# Altium PCB PCB1.PcbDoc
Units mm, origin at the board's own origin, x right, y up, seen from the top; angles counter-clockwise.
Board outline 200 x 100 mm, 2 copper layers (Top Layer, Bottom Layer); 140 components, 98 nets, 280 pads, 2 vias.
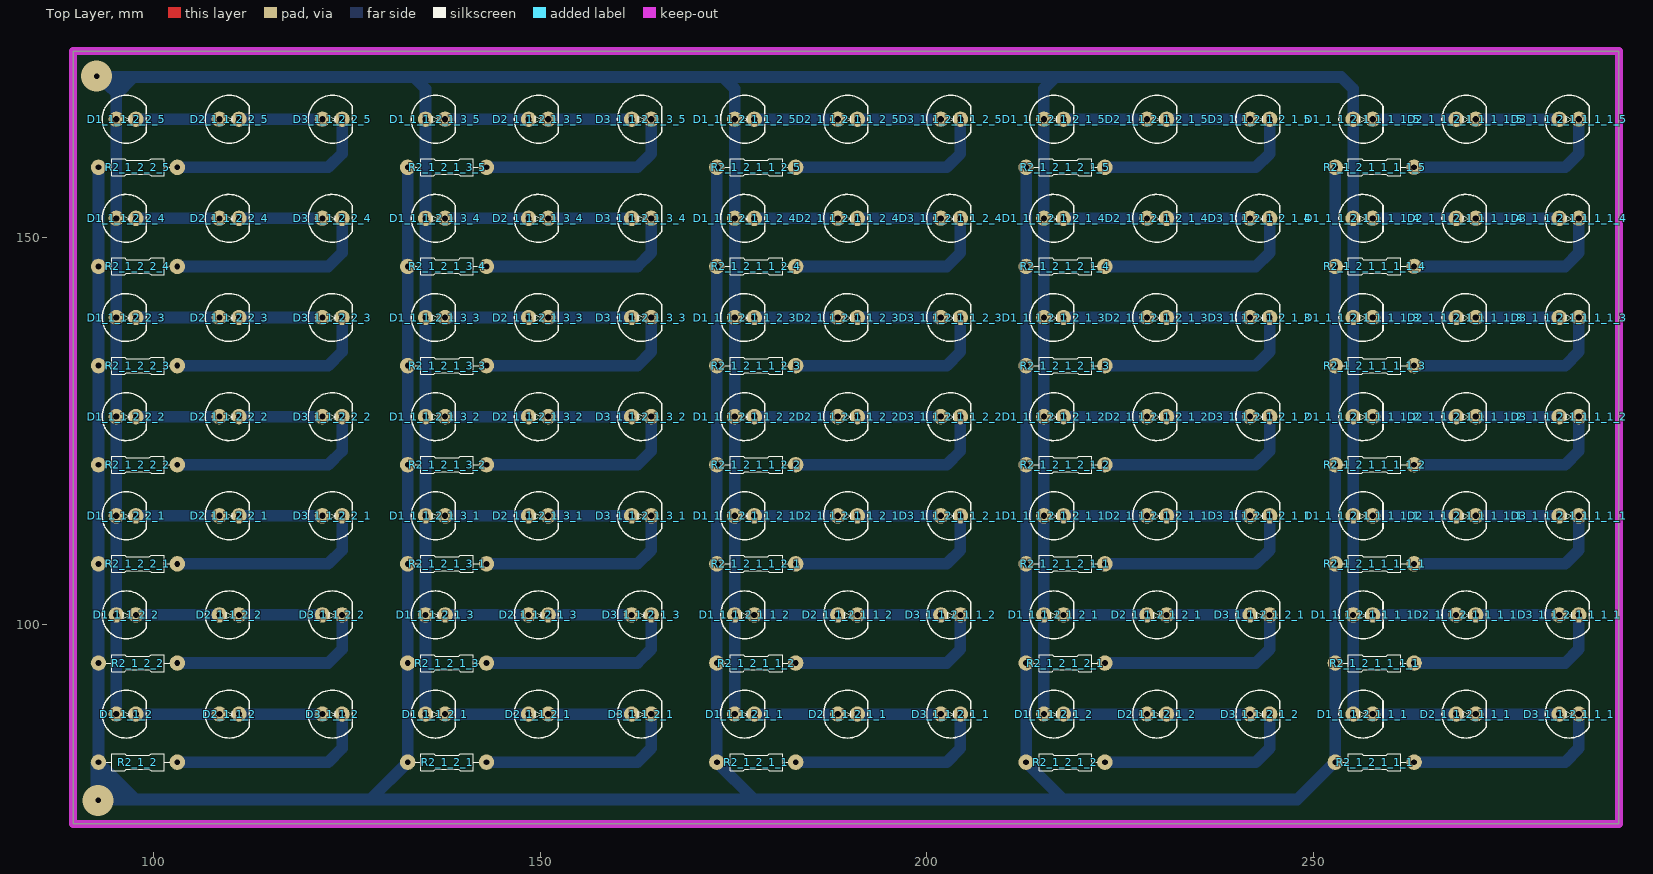
[diagram p0: Top Layer view]
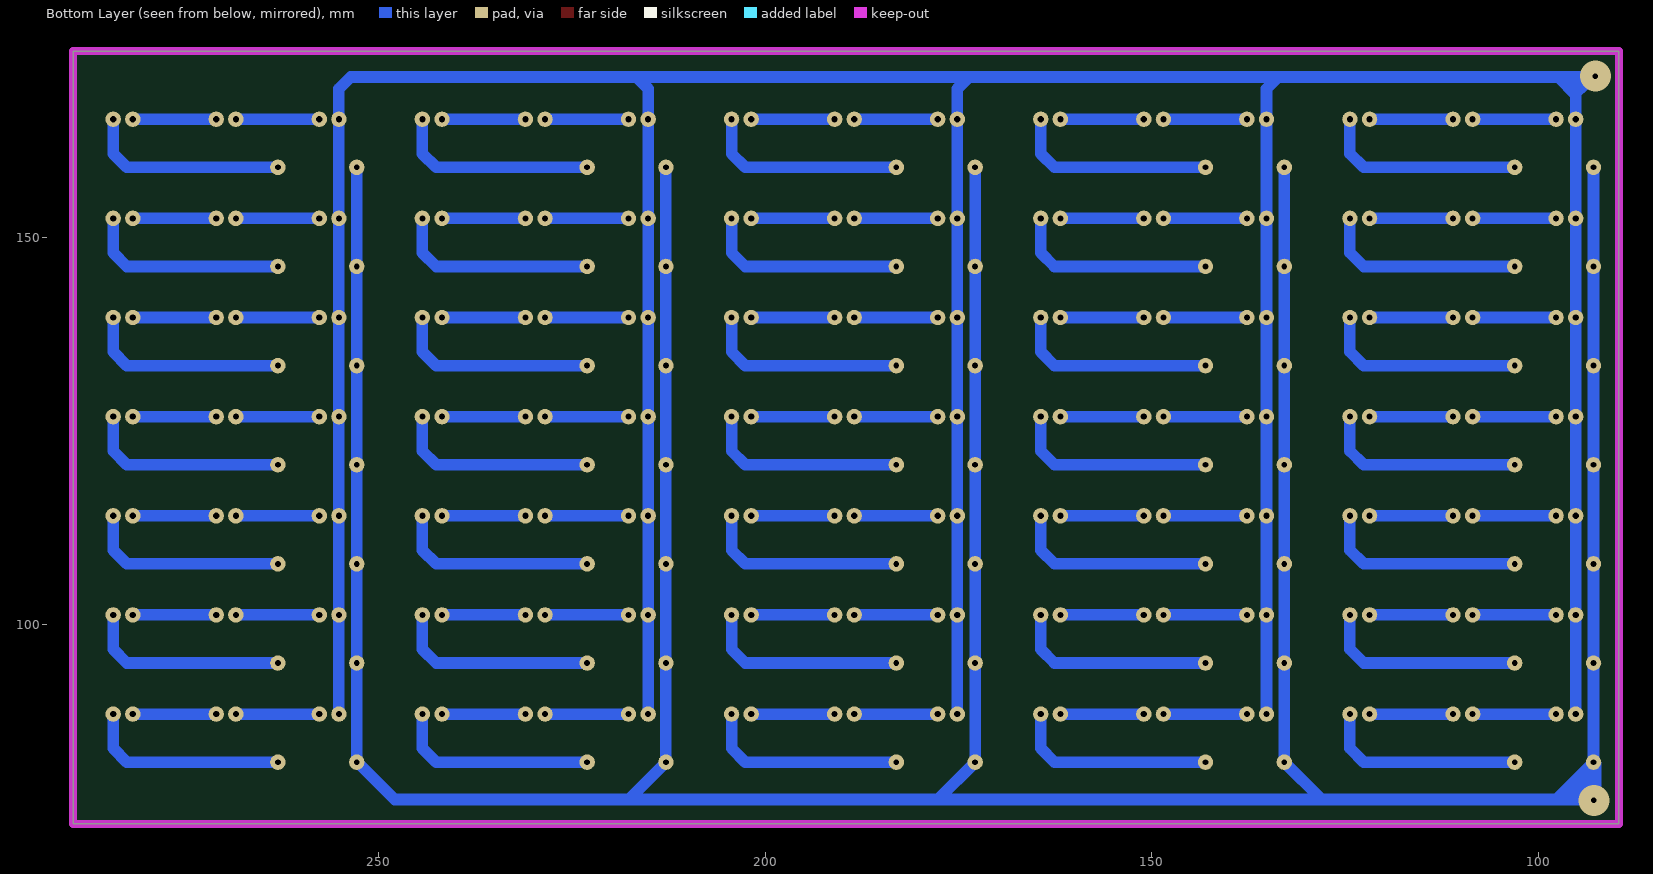
[diagram p1: Bottom Layer view, seen from below]

## Layer stack, top to bottom
Top Solder: solder mask 0.0102, Solder Resist, Dk 3.5
Top Layer: signal copper 0.0356
Dielectric 1: dielectric 0.32, FR-4, Dk 4.8
Bottom Layer: signal copper 0.0356
Bottom Solder: solder mask 0.0102, Solder Resist, Dk 3.5

## Board outline
89.535,74.168 289.535,74.168 289.535,174.168 89.535,174.168

## Design rules (kind name [scope] priority, off if disabled: settings)
Clearance [All] p1: gap=0.254 ignorepadtopadclearanceinfootprint=FALSE except(0: Arc-Hole Track-Hole SMDPad-Hole THPad-Hole Via-Hole Fill-Hole Poly-Hole Region-Hole Text-Hole)
PolygonConnect [All] p1: connectstyle=Relief reliefconductorwidth=0.254 reliefentries=4 polygonreliefangle="90 Angle" airgapwidth=0.254
RoutingVias [All] p1: holewidth=0.711 width=1.27 viastyle="Through Hole" minholewidth=0.711 minwidth=1.27 maxholewidth=0.711 maxwidth=1.27
SolderMaskExpansion [All] p1: expansion=0.102 istentingtop=FALSE
Width [All] p1: maxlimit=2 minlimit=0.5 preferedwidth=1
30 further rules are at their usual default settings.

## Components (designator, comment, footprint, x,y, rotation, side; value= is the part's Value field where it differs from the comment)
D1_1_1_2 "LED 5MM" LED5MM_BLUE 96.393,88.392 r0 top (schematic designator D1)
D1_1_1_2_1 "LED 5MM" LED5MM_BLUE 136.398,88.392 r0 top (schematic designator D1)
D1_1_1_2_1_1 "LED 5MM" LED5MM_BLUE 176.403,88.392 r0 top (schematic designator D1)
D1_1_1_2_1_1_1 "LED 5MM" LED5MM_BLUE 256.413,88.392 r0 top (schematic designator D1)
D1_1_1_2_1_1_1_1 "LED 5MM" LED5MM_BLUE 256.413,101.219 r0 top (schematic designator D1)
D1_1_1_2_1_1_1_1_1 "LED 5MM" LED5MM_BLUE 256.413,114.046 r0 top (schematic designator D1)
D1_1_1_2_1_1_1_1_2 "LED 5MM" LED5MM_BLUE 256.413,126.873 r0 top (schematic designator D1)
D1_1_1_2_1_1_1_1_3 "LED 5MM" LED5MM_BLUE 256.413,139.7 r0 top (schematic designator D1)
D1_1_1_2_1_1_1_1_4 "LED 5MM" LED5MM_BLUE 256.413,152.527 r0 top (schematic designator D1)
D1_1_1_2_1_1_1_1_5 "LED 5MM" LED5MM_BLUE 256.413,165.354 r0 top (schematic designator D1)
D1_1_1_2_1_1_2 "LED 5MM" LED5MM_BLUE 176.403,101.219 r0 top (schematic designator D1)
D1_1_1_2_1_1_2_1 "LED 5MM" LED5MM_BLUE 176.403,114.046 r0 top (schematic designator D1)
D1_1_1_2_1_1_2_2 "LED 5MM" LED5MM_BLUE 176.403,126.873 r0 top (schematic designator D1)
D1_1_1_2_1_1_2_3 "LED 5MM" LED5MM_BLUE 176.403,139.7 r0 top (schematic designator D1)
D1_1_1_2_1_1_2_4 "LED 5MM" LED5MM_BLUE 176.403,152.527 r0 top (schematic designator D1)
D1_1_1_2_1_1_2_5 "LED 5MM" LED5MM_BLUE 176.403,165.354 r0 top (schematic designator D1)
D1_1_1_2_1_2 "LED 5MM" LED5MM_BLUE 216.408,88.392 r0 top (schematic designator D1)
D1_1_1_2_1_2_1 "LED 5MM" LED5MM_BLUE 216.408,101.219 r0 top (schematic designator D1)
D1_1_1_2_1_2_1_1 "LED 5MM" LED5MM_BLUE 216.408,114.046 r0 top (schematic designator D1)
D1_1_1_2_1_2_1_2 "LED 5MM" LED5MM_BLUE 216.408,126.873 r0 top (schematic designator D1)
D1_1_1_2_1_2_1_3 "LED 5MM" LED5MM_BLUE 216.408,139.7 r0 top (schematic designator D1)
D1_1_1_2_1_2_1_4 "LED 5MM" LED5MM_BLUE 216.408,152.527 r0 top (schematic designator D1)
D1_1_1_2_1_2_1_5 "LED 5MM" LED5MM_BLUE 216.408,165.354 r0 top (schematic designator D1)
D1_1_1_2_1_3 "LED 5MM" LED5MM_BLUE 136.398,101.219 r0 top (schematic designator D1)
D1_1_1_2_1_3_1 "LED 5MM" LED5MM_BLUE 136.398,114.046 r0 top (schematic designator D1)
D1_1_1_2_1_3_2 "LED 5MM" LED5MM_BLUE 136.398,126.873 r0 top (schematic designator D1)
D1_1_1_2_1_3_3 "LED 5MM" LED5MM_BLUE 136.398,139.7 r0 top (schematic designator D1)
D1_1_1_2_1_3_4 "LED 5MM" LED5MM_BLUE 136.398,152.527 r0 top (schematic designator D1)
D1_1_1_2_1_3_5 "LED 5MM" LED5MM_BLUE 136.398,165.354 r0 top (schematic designator D1)
D1_1_1_2_2 "LED 5MM" LED5MM_BLUE 96.393,101.219 r0 top (schematic designator D1)
D1_1_1_2_2_1 "LED 5MM" LED5MM_BLUE 96.393,114.046 r0 top (schematic designator D1)
D1_1_1_2_2_2 "LED 5MM" LED5MM_BLUE 96.393,126.873 r0 top (schematic designator D1)
D1_1_1_2_2_3 "LED 5MM" LED5MM_BLUE 96.393,139.7 r0 top (schematic designator D1)
D1_1_1_2_2_4 "LED 5MM" LED5MM_BLUE 96.393,152.527 r0 top (schematic designator D1)
D1_1_1_2_2_5 "LED 5MM" LED5MM_BLUE 96.393,165.354 r0 top (schematic designator D1)
D2_1_1_2 "LED 5MM" LED5MM_BLUE 109.728,88.392 r0 top (schematic designator D2)
D2_1_1_2_1 "LED 5MM" LED5MM_BLUE 149.733,88.392 r0 top (schematic designator D2)
D2_1_1_2_1_1 "LED 5MM" LED5MM_BLUE 189.738,88.392 r0 top (schematic designator D2)
D2_1_1_2_1_1_1 "LED 5MM" LED5MM_BLUE 269.748,88.392 r0 top (schematic designator D2)
D2_1_1_2_1_1_1_1 "LED 5MM" LED5MM_BLUE 269.748,101.219 r0 top (schematic designator D2)
D2_1_1_2_1_1_1_1_1 "LED 5MM" LED5MM_BLUE 269.748,114.046 r0 top (schematic designator D2)
D2_1_1_2_1_1_1_1_2 "LED 5MM" LED5MM_BLUE 269.748,126.873 r0 top (schematic designator D2)
D2_1_1_2_1_1_1_1_3 "LED 5MM" LED5MM_BLUE 269.748,139.7 r0 top (schematic designator D2)
D2_1_1_2_1_1_1_1_4 "LED 5MM" LED5MM_BLUE 269.748,152.527 r0 top (schematic designator D2)
D2_1_1_2_1_1_1_1_5 "LED 5MM" LED5MM_BLUE 269.748,165.354 r0 top (schematic designator D2)
D2_1_1_2_1_1_2 "LED 5MM" LED5MM_BLUE 189.738,101.219 r0 top (schematic designator D2)
D2_1_1_2_1_1_2_1 "LED 5MM" LED5MM_BLUE 189.738,114.046 r0 top (schematic designator D2)
D2_1_1_2_1_1_2_2 "LED 5MM" LED5MM_BLUE 189.738,126.873 r0 top (schematic designator D2)
D2_1_1_2_1_1_2_3 "LED 5MM" LED5MM_BLUE 189.738,139.7 r0 top (schematic designator D2)
D2_1_1_2_1_1_2_4 "LED 5MM" LED5MM_BLUE 189.738,152.527 r0 top (schematic designator D2)
D2_1_1_2_1_1_2_5 "LED 5MM" LED5MM_BLUE 189.738,165.354 r0 top (schematic designator D2)
D2_1_1_2_1_2 "LED 5MM" LED5MM_BLUE 229.743,88.392 r0 top (schematic designator D2)
D2_1_1_2_1_2_1 "LED 5MM" LED5MM_BLUE 229.743,101.219 r0 top (schematic designator D2)
D2_1_1_2_1_2_1_1 "LED 5MM" LED5MM_BLUE 229.743,114.046 r0 top (schematic designator D2)
D2_1_1_2_1_2_1_2 "LED 5MM" LED5MM_BLUE 229.743,126.873 r0 top (schematic designator D2)
D2_1_1_2_1_2_1_3 "LED 5MM" LED5MM_BLUE 229.743,139.7 r0 top (schematic designator D2)
D2_1_1_2_1_2_1_4 "LED 5MM" LED5MM_BLUE 229.743,152.527 r0 top (schematic designator D2)
D2_1_1_2_1_2_1_5 "LED 5MM" LED5MM_BLUE 229.743,165.354 r0 top (schematic designator D2)
D2_1_1_2_1_3 "LED 5MM" LED5MM_BLUE 149.733,101.219 r0 top (schematic designator D2)
D2_1_1_2_1_3_1 "LED 5MM" LED5MM_BLUE 149.733,114.046 r0 top (schematic designator D2)
D2_1_1_2_1_3_2 "LED 5MM" LED5MM_BLUE 149.733,126.873 r0 top (schematic designator D2)
D2_1_1_2_1_3_3 "LED 5MM" LED5MM_BLUE 149.733,139.7 r0 top (schematic designator D2)
D2_1_1_2_1_3_4 "LED 5MM" LED5MM_BLUE 149.733,152.527 r0 top (schematic designator D2)
D2_1_1_2_1_3_5 "LED 5MM" LED5MM_BLUE 149.733,165.354 r0 top (schematic designator D2)
D2_1_1_2_2 "LED 5MM" LED5MM_BLUE 109.728,101.219 r0 top (schematic designator D2)
D2_1_1_2_2_1 "LED 5MM" LED5MM_BLUE 109.728,114.046 r0 top (schematic designator D2)
D2_1_1_2_2_2 "LED 5MM" LED5MM_BLUE 109.728,126.873 r0 top (schematic designator D2)
D2_1_1_2_2_3 "LED 5MM" LED5MM_BLUE 109.728,139.7 r0 top (schematic designator D2)
D2_1_1_2_2_4 "LED 5MM" LED5MM_BLUE 109.728,152.527 r0 top (schematic designator D2)
D2_1_1_2_2_5 "LED 5MM" LED5MM_BLUE 109.728,165.354 r0 top (schematic designator D2)
D3_1_1_2 "LED 5MM" LED5MM_BLUE 123.063,88.392 r0 top (schematic designator D2)
D3_1_1_2_1 "LED 5MM" LED5MM_BLUE 163.068,88.392 r0 top (schematic designator D2)
D3_1_1_2_1_1 "LED 5MM" LED5MM_BLUE 203.073,88.392 r0 top (schematic designator D2)
D3_1_1_2_1_1_1 "LED 5MM" LED5MM_BLUE 283.083,88.392 r0 top (schematic designator D2)
D3_1_1_2_1_1_1_1 "LED 5MM" LED5MM_BLUE 283.083,101.219 r0 top (schematic designator D2)
D3_1_1_2_1_1_1_1_1 "LED 5MM" LED5MM_BLUE 283.083,114.046 r0 top (schematic designator D2)
D3_1_1_2_1_1_1_1_2 "LED 5MM" LED5MM_BLUE 283.083,126.873 r0 top (schematic designator D2)
D3_1_1_2_1_1_1_1_3 "LED 5MM" LED5MM_BLUE 283.083,139.7 r0 top (schematic designator D2)
D3_1_1_2_1_1_1_1_4 "LED 5MM" LED5MM_BLUE 283.083,152.527 r0 top (schematic designator D2)
D3_1_1_2_1_1_1_1_5 "LED 5MM" LED5MM_BLUE 283.083,165.354 r0 top (schematic designator D2)
D3_1_1_2_1_1_2 "LED 5MM" LED5MM_BLUE 203.073,101.219 r0 top (schematic designator D2)
D3_1_1_2_1_1_2_1 "LED 5MM" LED5MM_BLUE 203.073,114.046 r0 top (schematic designator D2)
D3_1_1_2_1_1_2_2 "LED 5MM" LED5MM_BLUE 203.073,126.873 r0 top (schematic designator D2)
D3_1_1_2_1_1_2_3 "LED 5MM" LED5MM_BLUE 203.073,139.7 r0 top (schematic designator D2)
D3_1_1_2_1_1_2_4 "LED 5MM" LED5MM_BLUE 203.073,152.527 r0 top (schematic designator D2)
D3_1_1_2_1_1_2_5 "LED 5MM" LED5MM_BLUE 203.073,165.354 r0 top (schematic designator D2)
D3_1_1_2_1_2 "LED 5MM" LED5MM_BLUE 243.078,88.392 r0 top (schematic designator D2)
D3_1_1_2_1_2_1 "LED 5MM" LED5MM_BLUE 243.078,101.219 r0 top (schematic designator D2)
D3_1_1_2_1_2_1_1 "LED 5MM" LED5MM_BLUE 243.078,114.046 r0 top (schematic designator D2)
D3_1_1_2_1_2_1_2 "LED 5MM" LED5MM_BLUE 243.078,126.873 r0 top (schematic designator D2)
D3_1_1_2_1_2_1_3 "LED 5MM" LED5MM_BLUE 243.078,139.7 r0 top (schematic designator D2)
D3_1_1_2_1_2_1_4 "LED 5MM" LED5MM_BLUE 243.078,152.527 r0 top (schematic designator D2)
D3_1_1_2_1_2_1_5 "LED 5MM" LED5MM_BLUE 243.078,165.354 r0 top (schematic designator D2)
D3_1_1_2_1_3 "LED 5MM" LED5MM_BLUE 163.068,101.219 r0 top (schematic designator D2)
D3_1_1_2_1_3_1 "LED 5MM" LED5MM_BLUE 163.068,114.046 r0 top (schematic designator D2)
D3_1_1_2_1_3_2 "LED 5MM" LED5MM_BLUE 163.068,126.873 r0 top (schematic designator D2)
D3_1_1_2_1_3_3 "LED 5MM" LED5MM_BLUE 163.068,139.7 r0 top (schematic designator D2)
D3_1_1_2_1_3_4 "LED 5MM" LED5MM_BLUE 163.068,152.527 r0 top (schematic designator D2)
D3_1_1_2_1_3_5 "LED 5MM" LED5MM_BLUE 163.068,165.354 r0 top (schematic designator D2)
D3_1_1_2_2 "LED 5MM" LED5MM_BLUE 123.063,101.219 r0 top (schematic designator D2)
D3_1_1_2_2_1 "LED 5MM" LED5MM_BLUE 123.063,114.046 r0 top (schematic designator D2)
D3_1_1_2_2_2 "LED 5MM" LED5MM_BLUE 123.063,126.873 r0 top (schematic designator D2)
D3_1_1_2_2_3 "LED 5MM" LED5MM_BLUE 123.063,139.7 r0 top (schematic designator D2)
D3_1_1_2_2_4 "LED 5MM" LED5MM_BLUE 123.063,152.527 r0 top (schematic designator D2)
D3_1_1_2_2_5 "LED 5MM" LED5MM_BLUE 123.063,165.354 r0 top (schematic designator D2)
R2_1_2 "1K" "Axial 0_25 W, 0_4 IN LEAD PITCH" 97.917,82.169 r180 top (schematic designator R1)
R2_1_2_1 "1K" "Axial 0_25 W, 0_4 IN LEAD PITCH" 137.922,82.169 r180 top (schematic designator R1)
R2_1_2_1_1 "1K" "Axial 0_25 W, 0_4 IN LEAD PITCH" 177.927,82.169 r180 top (schematic designator R1)
R2_1_2_1_1_1 "1K" "Axial 0_25 W, 0_4 IN LEAD PITCH" 257.937,82.169 r180 top (schematic designator R1)
R2_1_2_1_1_1_1 "1K" "Axial 0_25 W, 0_4 IN LEAD PITCH" 257.937,94.996 r180 top (schematic designator R1)
R2_1_2_1_1_1_1_1 "1K" "Axial 0_25 W, 0_4 IN LEAD PITCH" 257.937,107.823 r180 top (schematic designator R1)
R2_1_2_1_1_1_1_2 "1K" "Axial 0_25 W, 0_4 IN LEAD PITCH" 257.937,120.65 r180 top (schematic designator R1)
R2_1_2_1_1_1_1_3 "1K" "Axial 0_25 W, 0_4 IN LEAD PITCH" 257.937,133.477 r180 top (schematic designator R1)
R2_1_2_1_1_1_1_4 "1K" "Axial 0_25 W, 0_4 IN LEAD PITCH" 257.937,146.304 r180 top (schematic designator R1)
R2_1_2_1_1_1_1_5 "1K" "Axial 0_25 W, 0_4 IN LEAD PITCH" 257.937,159.131 r180 top (schematic designator R1)
R2_1_2_1_1_2 "1K" "Axial 0_25 W, 0_4 IN LEAD PITCH" 177.927,94.996 r180 top (schematic designator R1)
R2_1_2_1_1_2_1 "1K" "Axial 0_25 W, 0_4 IN LEAD PITCH" 177.927,107.823 r180 top (schematic designator R1)
R2_1_2_1_1_2_2 "1K" "Axial 0_25 W, 0_4 IN LEAD PITCH" 177.927,120.65 r180 top (schematic designator R1)
R2_1_2_1_1_2_3 "1K" "Axial 0_25 W, 0_4 IN LEAD PITCH" 177.927,133.477 r180 top (schematic designator R1)
R2_1_2_1_1_2_4 "1K" "Axial 0_25 W, 0_4 IN LEAD PITCH" 177.927,146.304 r180 top (schematic designator R1)
R2_1_2_1_1_2_5 "1K" "Axial 0_25 W, 0_4 IN LEAD PITCH" 177.927,159.131 r180 top (schematic designator R1)
R2_1_2_1_2 "1K" "Axial 0_25 W, 0_4 IN LEAD PITCH" 217.932,82.169 r180 top (schematic designator R1)
R2_1_2_1_2_1 "1K" "Axial 0_25 W, 0_4 IN LEAD PITCH" 217.932,94.996 r180 top (schematic designator R1)
R2_1_2_1_2_1_1 "1K" "Axial 0_25 W, 0_4 IN LEAD PITCH" 217.932,107.823 r180 top (schematic designator R1)
R2_1_2_1_2_1_2 "1K" "Axial 0_25 W, 0_4 IN LEAD PITCH" 217.932,120.65 r180 top (schematic designator R1)
R2_1_2_1_2_1_3 "1K" "Axial 0_25 W, 0_4 IN LEAD PITCH" 217.932,133.477 r180 top (schematic designator R1)
R2_1_2_1_2_1_4 "1K" "Axial 0_25 W, 0_4 IN LEAD PITCH" 217.932,146.304 r180 top (schematic designator R1)
R2_1_2_1_2_1_5 "1K" "Axial 0_25 W, 0_4 IN LEAD PITCH" 217.932,159.131 r180 top (schematic designator R1)
R2_1_2_1_3 "1K" "Axial 0_25 W, 0_4 IN LEAD PITCH" 137.922,94.996 r180 top (schematic designator R1)
R2_1_2_1_3_1 "1K" "Axial 0_25 W, 0_4 IN LEAD PITCH" 137.922,107.823 r180 top (schematic designator R1)
R2_1_2_1_3_2 "1K" "Axial 0_25 W, 0_4 IN LEAD PITCH" 137.922,120.65 r180 top (schematic designator R1)
R2_1_2_1_3_3 "1K" "Axial 0_25 W, 0_4 IN LEAD PITCH" 137.922,133.477 r180 top (schematic designator R1)
R2_1_2_1_3_4 "1K" "Axial 0_25 W, 0_4 IN LEAD PITCH" 137.922,146.304 r180 top (schematic designator R1)
R2_1_2_1_3_5 "1K" "Axial 0_25 W, 0_4 IN LEAD PITCH" 137.922,159.131 r180 top (schematic designator R1)
R2_1_2_2 "1K" "Axial 0_25 W, 0_4 IN LEAD PITCH" 97.917,94.996 r180 top (schematic designator R1)
R2_1_2_2_1 "1K" "Axial 0_25 W, 0_4 IN LEAD PITCH" 97.917,107.823 r180 top (schematic designator R1)
R2_1_2_2_2 "1K" "Axial 0_25 W, 0_4 IN LEAD PITCH" 97.917,120.65 r180 top (schematic designator R1)
R2_1_2_2_3 "1K" "Axial 0_25 W, 0_4 IN LEAD PITCH" 97.917,133.477 r180 top (schematic designator R1)
R2_1_2_2_4 "1K" "Axial 0_25 W, 0_4 IN LEAD PITCH" 97.917,146.304 r180 top (schematic designator R1)
R2_1_2_2_5 "1K" "Axial 0_25 W, 0_4 IN LEAD PITCH" 97.917,159.131 r180 top (schematic designator R1)

## Footprints (in the part's own frame and the unit in brackets; to place one, negate y for a bottom-side part, rotate by r counter-clockwise, add the part's x,y. Pads: shape width x height; smd on the part's side, far side on the other; paste and mask are expansions set on the pad)
"Axial 0_25 W, 0_4 IN LEAD PITCH" [mm] "Designer Abbas Basereh"
  round 2 hole 0.75: 1(5.1,0) 2(-5.1,0)
  silkscreen extent -4.1,-1.1 4.1,1.1, body extent -5.4,-1.16 5.36,1.16, height 3.63
LED5MM_BLUE [mm] "LED 5MM THROUGH HOLE BLUE-Designer Abbas Basereh"
  round 2 hole 0.8: 1(-1.27,0) 2(1.27,0)
  silkscreen extent -3.1,-3.1 2.6,3.1, body extent -2.99,-2.98 2.43,3.04, height 12.31

## Part data
D1_1_1_2 D1_1_1_2_1 D1_1_1_2_1_1 D1_1_1_2_1_1_1 D1_1_1_2_1_1_1_1 D1_1_1_2_1_1_1_1_1 D1_1_1_2_1_1_1_1_2 D1_1_1_2_1_1_1_1_3 D1_1_1_2_1_1_1_1_4 D1_1_1_2_1_1_1_1_5 D1_1_1_2_1_1_2 D1_1_1_2_1_1_2_1 D1_1_1_2_1_1_2_2 D1_1_1_2_1_1_2_3 D1_1_1_2_1_1_2_4 D1_1_1_2_1_1_2_5 D1_1_1_2_1_2 D1_1_1_2_1_2_1 D1_1_1_2_1_2_1_1 D1_1_1_2_1_2_1_2 D1_1_1_2_1_2_1_3 D1_1_1_2_1_2_1_4 D1_1_1_2_1_2_1_5 D1_1_1_2_1_3 D1_1_1_2_1_3_1 D1_1_1_2_1_3_2 D1_1_1_2_1_3_3 D1_1_1_2_1_3_4 D1_1_1_2_1_3_5 D1_1_1_2_2 D1_1_1_2_2_1 D1_1_1_2_2_2 D1_1_1_2_2_3 D1_1_1_2_2_4 D1_1_1_2_2_5 D2_1_1_2 D2_1_1_2_1 D2_1_1_2_1_1 D2_1_1_2_1_1_1 D2_1_1_2_1_1_1_1 D2_1_1_2_1_1_1_1_1 D2_1_1_2_1_1_1_1_2 D2_1_1_2_1_1_1_1_3 D2_1_1_2_1_1_1_1_4 D2_1_1_2_1_1_1_1_5 D2_1_1_2_1_1_2 D2_1_1_2_1_1_2_1 D2_1_1_2_1_1_2_2 D2_1_1_2_1_1_2_3 D2_1_1_2_1_1_2_4 D2_1_1_2_1_1_2_5 D2_1_1_2_1_2 D2_1_1_2_1_2_1 D2_1_1_2_1_2_1_1 D2_1_1_2_1_2_1_2 D2_1_1_2_1_2_1_3 D2_1_1_2_1_2_1_4 D2_1_1_2_1_2_1_5 D2_1_1_2_1_3 D2_1_1_2_1_3_1 D2_1_1_2_1_3_2 D2_1_1_2_1_3_3 D2_1_1_2_1_3_4 D2_1_1_2_1_3_5 D2_1_1_2_2 D2_1_1_2_2_1 D2_1_1_2_2_2 D2_1_1_2_2_3 D2_1_1_2_2_4 D2_1_1_2_2_5 D3_1_1_2 D3_1_1_2_1 D3_1_1_2_1_1 D3_1_1_2_1_1_1 D3_1_1_2_1_1_1_1 D3_1_1_2_1_1_1_1_1 D3_1_1_2_1_1_1_1_2 D3_1_1_2_1_1_1_1_3 D3_1_1_2_1_1_1_1_4 D3_1_1_2_1_1_1_1_5 D3_1_1_2_1_1_2 D3_1_1_2_1_1_2_1 D3_1_1_2_1_1_2_2 D3_1_1_2_1_1_2_3 D3_1_1_2_1_1_2_4 D3_1_1_2_1_1_2_5 D3_1_1_2_1_2 D3_1_1_2_1_2_1 D3_1_1_2_1_2_1_1 D3_1_1_2_1_2_1_2 D3_1_1_2_1_2_1_3 D3_1_1_2_1_2_1_4 D3_1_1_2_1_2_1_5 D3_1_1_2_1_3 D3_1_1_2_1_3_1 D3_1_1_2_1_3_2 D3_1_1_2_1_3_3 D3_1_1_2_1_3_4 D3_1_1_2_1_3_5 D3_1_1_2_2 D3_1_1_2_2_1 D3_1_1_2_2_2 D3_1_1_2_2_3 D3_1_1_2_2_4 D3_1_1_2_2_5: "Light Emitting Diode", Data=16-12-2016, Designer="Abbas Basereh"
R2_1_2 R2_1_2_1 R2_1_2_1_1 R2_1_2_1_1_1 R2_1_2_1_1_1_1 R2_1_2_1_1_1_1_1 R2_1_2_1_1_1_1_2 R2_1_2_1_1_1_1_3 R2_1_2_1_1_1_1_4 R2_1_2_1_1_1_1_5 R2_1_2_1_1_2 R2_1_2_1_1_2_1 R2_1_2_1_1_2_2 R2_1_2_1_1_2_3 R2_1_2_1_1_2_4 R2_1_2_1_1_2_5 R2_1_2_1_2 R2_1_2_1_2_1 R2_1_2_1_2_1_1 R2_1_2_1_2_1_2 R2_1_2_1_2_1_3 R2_1_2_1_2_1_4 R2_1_2_1_2_1_5 R2_1_2_1_3 R2_1_2_1_3_1 R2_1_2_1_3_2 R2_1_2_1_3_3 R2_1_2_1_3_4 R2_1_2_1_3_5 R2_1_2_2 R2_1_2_2_1 R2_1_2_2_2 R2_1_2_2_3 R2_1_2_2_4 R2_1_2_2_5: library part "RES Axial 0.25W", "RES Axial 0.25W", Data=4-1-2017, Desc.="RES Axial 0.25W", Designer="Abbas Basereh"

## Via types
v1: diameter 4, hole 0.711, Top Layer to Bottom Layer, 2 vias

## Nets (pads, with @x,y where several pads share a name; then routed paths per layer and width w, separated by ;. In a path a pad name is that pad's centre, name@x,y a point inside that pad or via, vN(x,y) a via of type N, cw(c..) or ccw(c..) an arc to the next point about the centre after c; other vN are vias at no path point)
+12: 
GND: 
NetD1_2: 
NetD2_2: 
NetD3_2: 
NetD4_2: 
NetD5_2: 
NetD6_2: 
NetD7_2: 
NetD8_2: 
NetD9_2: 
NetD10_2: 
NetD11_2: 
NetD12_2: 
NetD13_2: 
NetD14_2: 
NetD15_2: 
NetD16_2: 
NetD17_2: 
NetD18_2: 
NetD19_2: 
NetD20_2: 
NetD21_2: 
NetD22_2: 
NetD23_2: 
NetD24_2: 
NetD25_2: 
NetD26_2: 
NetD27_2: 
NetD28_2: 
NetD29_2: 
NetD30_2: 
NetD31_2: 
NetD32_2: 
NetD33_2: 
NetD34_2: 
NetD35_2: 
NetD36_2: 
NetD37_2: 
NetD38_2: 
NetD39_2: 
NetD40_2: 
NetD41_2: 
NetD42_2: 
NetD43_2: 
NetD44_2: 
NetD45_2: 
NetD46_2: 
NetD47_2: 
NetD48_2: 
NetD49_2: 
NetD50_2: 
NetD51_2: 
NetD52_2: 
NetD53_2: 
NetD54_2: 
NetD55_2: 
NetD56_2: 
NetD57_2: 
NetD58_2: 
NetD59_2: 
NetD60_2: 
NetD61_2: 
NetD62_2: 
NetD63_2: 
NetD64_2: 
NetD65_2: 
NetD66_2: 
NetD67_2: 
NetD68_2: 
NetD69_2: 
NetD70_2: 
NetD71_2: 
NetD72_2: 
NetD73_2: 
NetD74_2: 
NetD75_2: 
NetD76_2: 
NetD77_2: 
NetD78_2: 
NetD79_2: 
NetD80_2: 
NetD81_2: 
NetD82_2: 
NetD83_2: 
NetD84_2: 
NetD85_2: 
NetD86_2: 
NetD87_2: 
NetD88_2: 
NetD89_2: 
NetD90_2: 
NetD91_2: 
NetD92_2: 
NetD93_2: 
NetD94_2: 
NetD95_2: 
NetD96_2: 
pads on no net: D1_1_1_2.1 D1_1_1_2.2 D1_1_1_2_1.1 D1_1_1_2_1.2 D1_1_1_2_1_1.1 D1_1_1_2_1_1.2 D1_1_1_2_1_1_1.1 D1_1_1_2_1_1_1.2 D1_1_1_2_1_1_1_1.1 D1_1_1_2_1_1_1_1.2 D1_1_1_2_1_1_1_1_1.1 D1_1_1_2_1_1_1_1_1.2 D1_1_1_2_1_1_1_1_2.1 D1_1_1_2_1_1_1_1_2.2 D1_1_1_2_1_1_1_1_3.1 D1_1_1_2_1_1_1_1_3.2 D1_1_1_2_1_1_1_1_4.1 D1_1_1_2_1_1_1_1_4.2 D1_1_1_2_1_1_1_1_5.1 D1_1_1_2_1_1_1_1_5.2 D1_1_1_2_1_1_2.1 D1_1_1_2_1_1_2.2 D1_1_1_2_1_1_2_1.1 D1_1_1_2_1_1_2_1.2 D1_1_1_2_1_1_2_2.1 D1_1_1_2_1_1_2_2.2 D1_1_1_2_1_1_2_3.1 D1_1_1_2_1_1_2_3.2 D1_1_1_2_1_1_2_4.1 D1_1_1_2_1_1_2_4.2 D1_1_1_2_1_1_2_5.1 D1_1_1_2_1_1_2_5.2 D1_1_1_2_1_2.1 D1_1_1_2_1_2.2 D1_1_1_2_1_2_1.1 D1_1_1_2_1_2_1.2 D1_1_1_2_1_2_1_1.1 D1_1_1_2_1_2_1_1.2 D1_1_1_2_1_2_1_2.1 D1_1_1_2_1_2_1_2.2 D1_1_1_2_1_2_1_3.1 D1_1_1_2_1_2_1_3.2 D1_1_1_2_1_2_1_4.1 D1_1_1_2_1_2_1_4.2 D1_1_1_2_1_2_1_5.1 D1_1_1_2_1_2_1_5.2 D1_1_1_2_1_3.1 D1_1_1_2_1_3.2 D1_1_1_2_1_3_1.1 D1_1_1_2_1_3_1.2 D1_1_1_2_1_3_2.1 D1_1_1_2_1_3_2.2 D1_1_1_2_1_3_3.1 D1_1_1_2_1_3_3.2 D1_1_1_2_1_3_4.1 D1_1_1_2_1_3_4.2 D1_1_1_2_1_3_5.1 D1_1_1_2_1_3_5.2 D1_1_1_2_2.1 D1_1_1_2_2.2 D1_1_1_2_2_1.1 D1_1_1_2_2_1.2 D1_1_1_2_2_2.1 D1_1_1_2_2_2.2 D1_1_1_2_2_3.1 D1_1_1_2_2_3.2 D1_1_1_2_2_4.1 D1_1_1_2_2_4.2 D1_1_1_2_2_5.1 D1_1_1_2_2_5.2 D2_1_1_2.1 D2_1_1_2.2 D2_1_1_2_1.1 D2_1_1_2_1.2 D2_1_1_2_1_1.1 D2_1_1_2_1_1.2 D2_1_1_2_1_1_1.1 D2_1_1_2_1_1_1.2 D2_1_1_2_1_1_1_1.1 D2_1_1_2_1_1_1_1.2 D2_1_1_2_1_1_1_1_1.1 D2_1_1_2_1_1_1_1_1.2 D2_1_1_2_1_1_1_1_2.1 D2_1_1_2_1_1_1_1_2.2 D2_1_1_2_1_1_1_1_3.1 D2_1_1_2_1_1_1_1_3.2 D2_1_1_2_1_1_1_1_4.1 D2_1_1_2_1_1_1_1_4.2 D2_1_1_2_1_1_1_1_5.1 D2_1_1_2_1_1_1_1_5.2 D2_1_1_2_1_1_2.1 D2_1_1_2_1_1_2.2 D2_1_1_2_1_1_2_1.1 D2_1_1_2_1_1_2_1.2 D2_1_1_2_1_1_2_2.1 D2_1_1_2_1_1_2_2.2 D2_1_1_2_1_1_2_3.1 D2_1_1_2_1_1_2_3.2 D2_1_1_2_1_1_2_4.1 D2_1_1_2_1_1_2_4.2 D2_1_1_2_1_1_2_5.1 D2_1_1_2_1_1_2_5.2 D2_1_1_2_1_2.1 D2_1_1_2_1_2.2 D2_1_1_2_1_2_1.1 D2_1_1_2_1_2_1.2 D2_1_1_2_1_2_1_1.1 D2_1_1_2_1_2_1_1.2 D2_1_1_2_1_2_1_2.1 D2_1_1_2_1_2_1_2.2 D2_1_1_2_1_2_1_3.1 D2_1_1_2_1_2_1_3.2 D2_1_1_2_1_2_1_4.1 D2_1_1_2_1_2_1_4.2 D2_1_1_2_1_2_1_5.1 D2_1_1_2_1_2_1_5.2 D2_1_1_2_1_3.1 D2_1_1_2_1_3.2 D2_1_1_2_1_3_1.1 D2_1_1_2_1_3_1.2 D2_1_1_2_1_3_2.1 D2_1_1_2_1_3_2.2 D2_1_1_2_1_3_3.1 D2_1_1_2_1_3_3.2 D2_1_1_2_1_3_4.1 D2_1_1_2_1_3_4.2 D2_1_1_2_1_3_5.1 D2_1_1_2_1_3_5.2 D2_1_1_2_2.1 D2_1_1_2_2.2 D2_1_1_2_2_1.1 D2_1_1_2_2_1.2 D2_1_1_2_2_2.1 D2_1_1_2_2_2.2 D2_1_1_2_2_3.1 D2_1_1_2_2_3.2 D2_1_1_2_2_4.1 D2_1_1_2_2_4.2 D2_1_1_2_2_5.1 D2_1_1_2_2_5.2 D3_1_1_2.1 D3_1_1_2.2 D3_1_1_2_1.1 D3_1_1_2_1.2 D3_1_1_2_1_1.1 D3_1_1_2_1_1.2 D3_1_1_2_1_1_1.1 D3_1_1_2_1_1_1.2 D3_1_1_2_1_1_1_1.1 D3_1_1_2_1_1_1_1.2 D3_1_1_2_1_1_1_1_1.1 D3_1_1_2_1_1_1_1_1.2 D3_1_1_2_1_1_1_1_2.1 D3_1_1_2_1_1_1_1_2.2 D3_1_1_2_1_1_1_1_3.1 D3_1_1_2_1_1_1_1_3.2 D3_1_1_2_1_1_1_1_4.1 D3_1_1_2_1_1_1_1_4.2 D3_1_1_2_1_1_1_1_5.1 D3_1_1_2_1_1_1_1_5.2 D3_1_1_2_1_1_2.1 D3_1_1_2_1_1_2.2 D3_1_1_2_1_1_2_1.1 D3_1_1_2_1_1_2_1.2 D3_1_1_2_1_1_2_2.1 D3_1_1_2_1_1_2_2.2 D3_1_1_2_1_1_2_3.1 D3_1_1_2_1_1_2_3.2 D3_1_1_2_1_1_2_4.1 D3_1_1_2_1_1_2_4.2 D3_1_1_2_1_1_2_5.1 D3_1_1_2_1_1_2_5.2 D3_1_1_2_1_2.1 D3_1_1_2_1_2.2 D3_1_1_2_1_2_1.1 D3_1_1_2_1_2_1.2 D3_1_1_2_1_2_1_1.1 D3_1_1_2_1_2_1_1.2 D3_1_1_2_1_2_1_2.1 D3_1_1_2_1_2_1_2.2 D3_1_1_2_1_2_1_3.1 D3_1_1_2_1_2_1_3.2 D3_1_1_2_1_2_1_4.1 D3_1_1_2_1_2_1_4.2 D3_1_1_2_1_2_1_5.1 D3_1_1_2_1_2_1_5.2 D3_1_1_2_1_3.1 D3_1_1_2_1_3.2 D3_1_1_2_1_3_1.1 D3_1_1_2_1_3_1.2 D3_1_1_2_1_3_2.1 D3_1_1_2_1_3_2.2 D3_1_1_2_1_3_3.1 D3_1_1_2_1_3_3.2 D3_1_1_2_1_3_4.1 D3_1_1_2_1_3_4.2 D3_1_1_2_1_3_5.1 D3_1_1_2_1_3_5.2 D3_1_1_2_2.1 D3_1_1_2_2.2 D3_1_1_2_2_1.1 D3_1_1_2_2_1.2 D3_1_1_2_2_2.1 D3_1_1_2_2_2.2 D3_1_1_2_2_3.1 D3_1_1_2_2_3.2 D3_1_1_2_2_4.1 D3_1_1_2_2_4.2 D3_1_1_2_2_5.1 D3_1_1_2_2_5.2 R2_1_2.1 R2_1_2.2 R2_1_2_1.1 R2_1_2_1.2 R2_1_2_1_1.1 R2_1_2_1_1.2 R2_1_2_1_1_1.1 R2_1_2_1_1_1.2 R2_1_2_1_1_1_1.1 R2_1_2_1_1_1_1.2 R2_1_2_1_1_1_1_1.1 R2_1_2_1_1_1_1_1.2 R2_1_2_1_1_1_1_2.1 R2_1_2_1_1_1_1_2.2 R2_1_2_1_1_1_1_3.1 R2_1_2_1_1_1_1_3.2 R2_1_2_1_1_1_1_4.1 R2_1_2_1_1_1_1_4.2 R2_1_2_1_1_1_1_5.1 R2_1_2_1_1_1_1_5.2 R2_1_2_1_1_2.1 R2_1_2_1_1_2.2 R2_1_2_1_1_2_1.1 R2_1_2_1_1_2_1.2 R2_1_2_1_1_2_2.1 R2_1_2_1_1_2_2.2 R2_1_2_1_1_2_3.1 R2_1_2_1_1_2_3.2 R2_1_2_1_1_2_4.1 R2_1_2_1_1_2_4.2 R2_1_2_1_1_2_5.1 R2_1_2_1_1_2_5.2 R2_1_2_1_2.1 R2_1_2_1_2.2 R2_1_2_1_2_1.1 R2_1_2_1_2_1.2 R2_1_2_1_2_1_1.1 R2_1_2_1_2_1_1.2 R2_1_2_1_2_1_2.1 R2_1_2_1_2_1_2.2 R2_1_2_1_2_1_3.1 R2_1_2_1_2_1_3.2 R2_1_2_1_2_1_4.1 R2_1_2_1_2_1_4.2 R2_1_2_1_2_1_5.1 R2_1_2_1_2_1_5.2 R2_1_2_1_3.1 R2_1_2_1_3.2 R2_1_2_1_3_1.1 R2_1_2_1_3_1.2 R2_1_2_1_3_2.1 R2_1_2_1_3_2.2 R2_1_2_1_3_3.1 R2_1_2_1_3_3.2 R2_1_2_1_3_4.1 R2_1_2_1_3_4.2 R2_1_2_1_3_5.1 R2_1_2_1_3_5.2 R2_1_2_2.1 R2_1_2_2.2 R2_1_2_2_1.1 R2_1_2_2_1.2 R2_1_2_2_2.1 R2_1_2_2_2.2 R2_1_2_2_3.1 R2_1_2_2_3.2 R2_1_2_2_4.1 R2_1_2_2_4.2 R2_1_2_2_5.1 R2_1_2_2_5.2
copper on no net: | length 2824.2
  Bottom Layer w1.5: 92.817,159.131 92.817,146.304 92.817,133.477 92.817,120.65 92.817,107.823 92.817,94.996 92.817,82.169 97.643,77.343 127.996,77.343 ; 95.123,88.392 95.123,165.354 95.123,168.529 97.409,170.815 253.619,170.815 255.143,169.291 255.143,165.354 255.143,88.392 ; 97.663,88.392 108.458,88.392 ; 97.663,101.219 108.458,101.219 ; 97.663,114.046 108.458,114.046 ; 97.663,126.873 108.458,126.873 ; 97.663,139.7 108.458,139.7 ; 97.663,152.527 108.458,152.527 ; 97.663,165.354 108.458,165.354 ; 103.017,82.169 122.555,82.169 124.333,83.947 124.333,88.392 ; 103.017,94.996 122.555,94.996 124.333,96.774 124.333,101.219 ; 103.017,107.823 122.555,107.823 124.333,109.601 124.333,114.046 ; 103.017,120.65 122.555,120.65 124.333,122.428 124.333,126.873 ; 103.017,133.477 122.555,133.477 124.333,135.255 124.333,139.7 ; 103.017,146.304 122.555,146.304 124.333,148.082 124.333,152.527 ; 103.017,159.131 122.555,159.131 124.333,160.909 124.333,165.354 ; 110.998,88.392 121.793,88.392 ; 110.998,101.219 121.793,101.219 ; 110.998,114.046 121.793,114.046 ; 110.998,126.873 121.793,126.873 ; 110.998,139.7 121.793,139.7 ; 110.998,152.527 121.793,152.527 ; 110.998,165.354 121.793,165.354 ; 132.822,159.131 132.822,146.304 132.822,133.477 132.822,120.65 132.822,107.823 132.822,94.996 132.822,82.169 127.996,77.343 ; 133.604,170.815 135.128,169.291 135.128,165.354 135.128,88.392 ; 137.668,88.392 148.463,88.392 ; 137.668,101.219 148.463,101.219 ; 137.668,114.046 148.463,114.046 ; 137.668,126.873 148.463,126.873 ; 137.668,139.7 148.463,139.7 ; 137.668,152.527 148.463,152.527 ; 137.668,165.354 148.463,165.354 ; 143.022,82.169 162.56,82.169 164.338,83.947 164.338,88.392 ; 143.022,94.996 162.56,94.996 164.338,96.774 164.338,101.219 ; 143.022,107.823 162.56,107.823 164.338,109.601 164.338,114.046 ; 143.022,120.65 162.56,120.65 164.338,122.428 164.338,126.873 ; 143.022,133.477 162.56,133.477 164.338,135.255 164.338,139.7 ; 143.022,146.304 162.56,146.304 164.338,148.082 164.338,152.527 ; 143.022,159.131 162.56,159.131 164.338,160.909 164.338,165.354 ; 151.003,88.392 161.798,88.392 ; 151.003,101.219 161.798,101.219 ; 151.003,114.046 161.798,114.046 ; 151.003,126.873 161.798,126.873 ; 151.003,139.7 161.798,139.7 ; 151.003,152.527 161.798,152.527 ; 151.003,165.354 161.798,165.354 ; 172.827,159.131 172.827,82.169 177.653,77.343 ; 173.609,170.815 175.133,169.291 175.133,165.354 175.133,88.392 ; 177.673,88.392 188.468,88.392 ; 177.673,101.219 188.468,101.219 ; 177.673,114.046 188.468,114.046 ; 177.673,126.873 188.468,126.873 ; 177.673,139.7 188.468,139.7 ; 177.673,152.527 188.468,152.527 ; 177.673,165.354 188.468,165.354 ; 183.027,82.169 202.565,82.169 204.343,83.947 204.343,88.392 ; 183.027,94.996 202.565,94.996 204.343,96.774 204.343,101.219 ; 183.027,107.823 202.565,107.823 204.343,109.601 204.343,114.046 ; 183.027,120.65 202.565,120.65 204.343,122.428 204.343,126.873 ; 183.027,133.477 202.565,133.477 204.343,135.255 204.343,139.7 ; 183.027,146.304 202.565,146.304 204.343,148.082 204.343,152.527 ; 183.027,159.131 202.565,159.131 204.343,160.909 204.343,165.354 ; 191.008,88.392 201.803,88.392 ; 191.008,101.219 201.803,101.219 ; 191.008,114.046 201.803,114.046 ; 191.008,126.873 201.803,126.873 ; 191.008,139.7 201.803,139.7 ; 191.008,152.527 201.803,152.527 ; 191.008,165.354 201.803,165.354 ; 212.832,159.131 212.832,82.169 217.658,77.343 ; 215.138,88.392 215.138,165.354 215.138,169.291 216.662,170.815 ; 217.678,88.392 228.473,88.392 ; 217.678,101.219 228.473,101.219 ; 217.678,114.046 228.473,114.046 ; 217.678,126.873 228.473,126.873 ; 217.678,139.7 228.473,139.7 ; 217.678,152.527 228.473,152.527 ; 217.678,165.354 228.473,165.354 ; 223.032,82.169 242.57,82.169 244.348,83.947 244.348,88.392 ; 223.032,94.996 242.57,94.996 244.348,96.774 244.348,101.219 ; 223.032,107.823 242.57,107.823 244.348,109.601 244.348,114.046 ; 223.032,120.65 242.57,120.65 244.348,122.428 244.348,126.873 ; 223.032,133.477 242.57,133.477 244.348,135.255 244.348,139.7 ; 223.032,146.304 242.57,146.304 244.348,148.082 244.348,152.527 ; 223.032,159.131 242.57,159.131 244.348,160.909 244.348,165.354 ; 231.013,88.392 241.808,88.392 ; 231.013,101.219 241.808,101.219 ; 231.013,114.046 241.808,114.046 ; 231.013,126.873 241.808,126.873 ; 231.013,139.7 241.808,139.7 ; 231.013,152.527 241.808,152.527 ; 231.013,165.354 241.808,165.354 ; 252.837,159.131 252.837,146.304 252.837,133.477 252.837,120.65 252.837,107.823 252.837,94.996 252.837,82.169 252.73,82.169 247.904,77.343 127.996,77.343 ; 257.683,88.392 268.478,88.392 ; 257.683,101.219 268.478,101.219 ; 257.683,114.046 268.478,114.046 ; 257.683,126.873 268.478,126.873 ; 257.683,139.7 268.478,139.7 ; 257.683,152.527 268.478,152.527 ; 257.683,165.354 268.478,165.354 ; 263.037,82.169 282.575,82.169 284.353,83.947 284.353,88.392 ; 263.037,94.996 282.575,94.996 284.353,96.774 284.353,101.219 ; 263.037,107.823 282.575,107.823 284.353,109.601 284.353,114.046 ; 263.037,120.65 282.575,120.65 284.353,122.428 284.353,126.873 ; 263.037,133.477 282.575,133.477 284.353,135.255 284.353,139.7 ; 263.037,146.304 282.575,146.304 284.353,148.082 284.353,152.527 ; 263.037,159.131 282.575,159.131 284.353,160.909 284.353,165.354 ; 271.018,88.392 281.813,88.392 ; 271.018,101.219 281.813,101.219 ; 271.018,114.046 281.813,114.046 ; 271.018,126.873 281.813,126.873 ; 271.018,139.7 281.813,139.7 ; 271.018,152.527 281.813,152.527 ; 271.018,165.354 281.813,165.354
  other v1: 92.761,77.216 92.583,170.942

## Polygon pours and split planes (outlines as drawn)
no net on Bottom Layer "NONET_L02_P000" (solid, pour order 0): 98.044,77.216

## Keep-outs
Keep-Out Layer:
  the board outline again, w1

## Other copper
Bottom Layer:
  region: 98.552,171.577 93.345,171.577 92.202,170.434 94.488,168.402
  region: 98.298,171.45
  region: 98.806,76.581 93.98,76.581 91.821,78.74 91.821,82.169 92.837,82.169 93.091,81.915